# Altium PCB final_sensor_pcb.PcbDoc (part 1 of 3)
Units mm, origin at the board's own origin, x right, y up, seen from the top; angles counter-clockwise.
Board outline 100.5 x 21.64 mm, 2 copper layers (Top Layer, Bottom Layer); 86 components, 53 nets, 234 pads, 76 vias.
Unrouted connection lines stored in the file: 1.
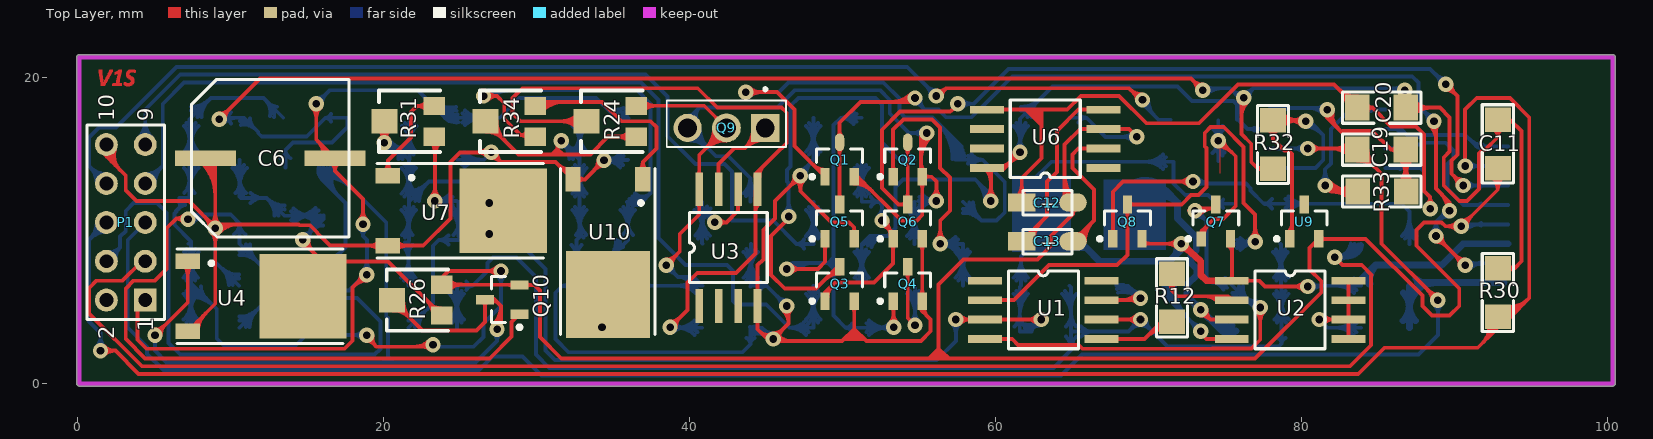
[diagram p0: Top Layer view]
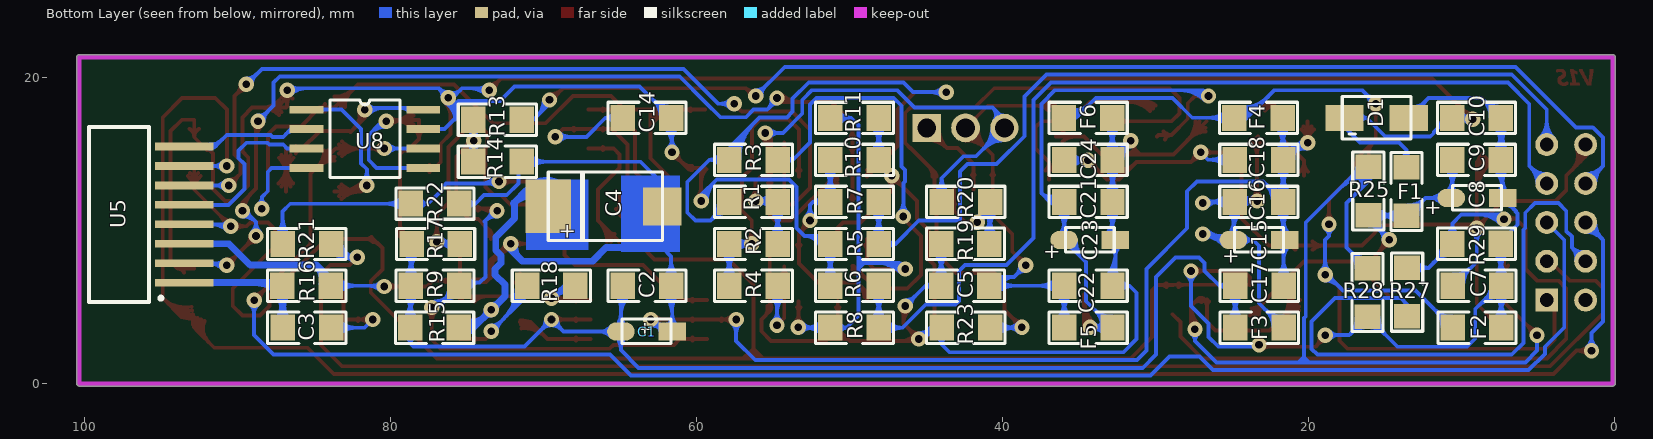
[diagram p1: Bottom Layer view, seen from below]

## Layer stack, top to bottom
Top Layer: signal copper 0.0356
Dielectric: dielectric 0.32, FR-4, Dk 4.8
Bottom Layer: signal copper 0.0356

## Board outline
0.127,-0.15 cw(c0.127,0) -0.023,0 -0.023,21.336 cw(c0.127,21.336) 0.127,21.486 100.33,21.486 cw(c100.33,21.336) 100.48,21.336 100.48,0 cw(c100.33,0) 100.33,-0.15

## Design rules (kind name [scope] priority, off if disabled: settings)
Clearance [All] p1: gap=0.254
DiffPairsRouting [All] p1: maxlimit=0.254 minlimit=0.254 mostfreqgap=0.254 maxuncoupledlength=12.7
PolygonConnect [All] p1: connectstyle=Relief reliefconductorwidth=0.254 reliefentries=4 polygonreliefangle="90 Angle"
RoutingVias [All] p1: holewidth=0.5 width=1 viastyle="Through Hole" minholewidth=0.5 minwidth=1 maxholewidth=0.5 maxwidth=1
SilkscreenOverComponentPads [All] p1: minsilkscreentomaskgap=0.254
SolderMaskExpansion [All] p1: expansion=0.102
Width [All] p1: maxlimit=0.5 minlimit=0.15 preferedwidth=0.15
26 further rules are at their usual default settings.

## Classes and differential pairs
differential pair OUT: +OUT_P -OUT_N

## Components (designator, comment, footprint, x,y, rotation, side; value= is the part's Value field where it differs from the comment)
C1 "4.7uf" cap_smd_a 63.259,3.433 r180 bottom
C2 "100nF" 1206 63.221,6.375 r270 bottom
C3 "0.22UF" 1206 85.471,3.683 r90 bottom
C4 "470uf" cap_smd_d 65.913,11.557 r0 bottom
C5 "100nf" 1206 42.418,6.375 r270 bottom
C6 "1000uf" c_cyl_smd 12.573,14.605 r180 top
C7 "100nf" 1206 9.017,6.426 r90 bottom
C8 "4.7uf" cap_smd_a 9.007,12.163 r180 bottom
C9 "100nf" 1206 9.045,14.656 r90 bottom
C10 "100nf" 1206 9.045,17.399 r90 bottom
C11 "100nf" 1206 92.837,15.685 r0 top
C12 "10uf" cap_smd_a 63.384,11.811 r180 top
C13 "10uf" cap_smd_a 63.384,9.271 r180 top
C14 "100nf" 1206 63.221,17.348 r270 bottom
C15 "4.7uf" cap_smd_a 23.241,9.419 r180 bottom
C16 "100nf" 1206 23.268,11.913 r90 bottom
C17 "100nf" 1206 23.241,6.426 r90 bottom
C18 "100nf" 1206 23.268,14.656 r90 bottom
C19 "Ceramic 330n" 1206 85.242,15.265 r270 top
C20 "100nf" 1206 85.242,18.009 r270 top
C21 "100nf" 1206 34.417,11.913 r90 bottom
C22 "100nf" 1206 34.417,6.426 r90 bottom
C23 "4.7uf" cap_smd_a 34.301,9.419 r180 bottom
C24 "100nf" 1206 34.417,14.656 r90 bottom
D1 "SMBJ5" tvs 15.621,17.399 r90 bottom
F1 "Ferrite bead" 1206 13.589,12.573 r180 bottom
F2 "Ferrite bead" 1206 8.992,3.632 r270 bottom
F3 "Ferrite bead" 1206 23.241,3.683 r90 bottom
F4 "Ferrite bead" 1206 23.268,17.348 r270 bottom
F5 "Ferrite bead" 1206 34.417,3.683 r90 bottom
F6 "Ferrite bead" 1206 34.392,17.348 r270 bottom
P1 "Header 5X2" HDR2X5 4.445,5.461 r90 top
Q1 "bc807" sot-23#1 49.784,14.605 r0 top
Q2 "bc807" sot-23#1 54.229,14.605 r0 top
Q3 "bc817" sot-23#2 49.784,6.477 r0 top
Q4 "bc817" sot-23#2 54.229,6.477 r0 top
Q5 "bc817" sot-23#2 49.784,10.541 r0 top
Q6 "bc817" sot-23#2 54.229,10.541 r0 top
Q7 "bc817" sot-23#3 74.358,10.541 r0 top
Q8 "bc817" sot-23#2 68.58,10.541 r0 top
Q9 "BD135" sot-32 42.418,17.018 r180 top
Q10 "bc817" sot-23#2 27.813,5.461 r90 top
R1 "10k" 1206 56.261,11.862 r270 bottom
R2 "10k" 1206 56.261,9.102 r270 bottom
R3 "1k" 1206 56.261,14.605 r270 bottom
R4 "1k" 1206 56.261,6.375 r270 bottom
R5 "0" 1206 49.657,9.102 r270 bottom
R6 "0" 1206 49.657,6.375 r270 bottom
R7 "470" 1206 49.657,11.862 r270 bottom
R8 "470" 1206 49.657,3.632 r270 bottom
R9 "18K" 1206 77.088,6.426 r90 bottom
R10 "10k" 1206 49.657,14.605 r270 bottom
R11 "10k" 1206 49.657,17.348 r270 bottom
R12 "100" 1206 71.501,5.6 r180 top
R13 "1K" 1206 73.024,17.272 r90 bottom
R14 "10K" 1206 73.024,14.529 r90 bottom
R15 "22" 1206 77.089,3.632 r270 bottom
R16 "1.5" 1206 85.446,6.375 r270 bottom
R17 "18K" 1206 77.05,9.153 r90 bottom
R18 "100" 1206 69.469,6.375 r270 bottom
R19 "10k" 1206 42.418,9.119 r270 bottom
R20 "10k" 1206 42.418,11.913 r90 bottom
R21 "1K" 1206 85.471,9.153 r90 bottom
R22 "10K" 1206 77.088,11.785 r90 bottom
R23 "10k" 1206 42.418,3.683 r90 bottom
R24 "RPot" "pot smd" 34.925,17.145 r90 top
R25 "Resistor" 1206 16.129,12.573 r0 bottom
R26 "RPot" "pot smd" 22.225,5.461 r90 top
R27 "1K" 1206 13.589,5.969 r0 bottom
R28 "Resistor" 1206 16.129,5.969 r180 bottom
R29 "1K" 1206 9.045,9.169 r90 bottom
R30 "Resistor" 1206 92.837,5.969 r0 top
R31 "RPot" "pot smd" 21.717,17.145 r90 top
R32 "Resistor" 1206 78.105,15.621 r180 top
R33 "Res 3K2" 1206 85.217,12.573 r90 top
R34 "RPot" "pot smd" 28.321,17.145 r90 top
U1 "TC4428" sop8 63.119,4.953 r0 top
U2 "IRF7105" sop8 79.248,4.953 r0 top
U3 "LM358N" sop8 42.418,8.89 r90 top
U4 "LM1117T-ADJ" dpak 10.541,5.461 r0 top
U5 "HMC1001" HMC1001 95.377,11.049 r90 bottom
U6 "LMC7660IM" sop8 63.246,15.875 r180 top
U7 "LM1117T-ADJ" dpak 23.622,11.049 r0 top
U8 "AMP04" sop8 81.661,16.129 r180 bottom
U9 "LM4040" sot-23#2 80.137,10.541 r0 top
U10 "LM1117T-ADJ" dpak 34.417,10.033 r270 top

## Footprints (in the part's own frame and the unit in brackets; to place one, negate y for a bottom-side part, rotate by r counter-clockwise, add the part's x,y. Pads: shape width x height; smd on the part's side, far side on the other; paste and mask are expansions set on the pad)
1206 [mm]
  rect 1.7x1.6 smd: 1(-0.025,-1.6) 2(-0.025,1.563)
  silkscreen extent -1.04,-2.57 0.99,2.54, body extent -0.81,-1.68 0.79,1.68, height 1.1
c_cyl_smd [mm]
  rect 4x1 smd: 1(4.191,-0.127) 2(-4.267,-0.127)
  silkscreen extent -5.18,-5.28 5.12,5.02, body extent -5.18,-5.28 5.12,5.02, height 10
cap_smd_a [mm]
  oval 1.8x1.2 smd: 1(-1.676,-0.025)
  rect 1.8x1.2 smd: 2(1.676,-0.025)
  silkscreen extent -1.6,-0.81 1.6,0.79
cap_smd_d [mm]
  rect 3x3.5 smd: 1(3.767,-0.025)
  rect 2.5x2.5 smd: 2(-3.683,-0.025)
  silkscreen extent -3.68,-2.29 3.77,2.21
dpak [mm]
  rect 1.6x1 smd: 1(-3.319,2.539) 3(-3.319,-2.031)
  rect 5.7x5.5 smd: 2(4.208,0.254)
  silkscreen extent -4.02,-2.83 6.83,3.34
HDR2X5 [mm] "Connector; Header; 5x2 Position"
  rect 1.5x1.5 hole 0.9: 1(0,0)
  round 1.5 hole 0.9: 2(0,2.54) 3(2.54,0) 4(2.54,2.54) 5(5.08,0) 6(5.08,2.54) 7(7.62,0) 8(7.62,2.54) 9(10.16,0) 10(10.16,2.54)
  silkscreen extent -1.27,-1.27 11.43,3.81
HMC1001 [mm]
  rect 0.5x3.81 smd: 1(-4.445,-1.905) 2(-3.175,-1.905) 3(-1.905,-1.905) 4(-0.635,-1.905) 5(0.635,-1.905) 6(1.905,-1.905) 7(3.175,-1.905) 8(4.445,-1.905)
  silkscreen extent -5.71,-0.48 5.71,4.32
"pot smd" [mm]
  rect 1.2x1.4 smd: 1(-1,-1.6) 3(1,-1.6)
  rect 1.6x1.7 smd: 2(0,1.65)
  silkscreen extent -2,-2 2,2
sop8 [mm]
  rect 2.2x0.5 smd: 1(-3.81,1.778) 2(-3.81,0.508) 3(-3.81,-0.762) 4(-3.81,-2.032) 5(3.806,-2.032) 6(3.806,-0.762) 7(3.806,0.508) 8(3.806,1.778)
  silkscreen extent -2.29,-2.67 2.29,2.41
sot-23#1 [mm]
  rect 0.6x1.15 smd: 1(-0.919,-1.081) 2(0.981,-1.081)
  oval 0.6x1.15 smd: 3(0.031,1.169)
  silkscreen extent -1.89,-1.21 1.53,0.74, body extent -1.42,-1.18 1.48,1.12, height 1
sot-23#2 [mm]
  rect 0.6x1.15 smd: 1(-0.919,-1.081) 2(0.981,-1.081) 3(0.031,1.169)
  silkscreen extent -1.89,-1.21 1.53,0.74, body extent -1.42,-1.18 1.48,1.12, height 1
sot-23#3 [mm]
  rect 0.6x1 smd: 1(-0.919,-1.081)
  rect 0.6x1.15 smd: 2(0.981,-1.081) 3(0.031,1.169)
  silkscreen extent -1.89,-1.21 1.53,0.74, body extent -1.42,-1.18 1.48,1.12, height 1
sot-32 [mm]
  rect 1.85x1.85 hole 1.23: 1(-2.54,0.305)
  round 1.88 hole 1.25: 2(0,0.305)
  round 1.85 hole 1.23: 3(2.54,0.305)
  silkscreen extent -3.9,-2.32 3.9,1.56
tvs [mm]
  rect 1.7x2.5 smd: 1(-0.025,-2.159) 2(-0.025,2.032)
  silkscreen extent -1.42,-2.32 1.38,2.18, body extent -1.5,-2.76 1.42,2.74, height 2.23

## Part data
C1 C4 C8 C12 C13 C15 C23: library part "Cap Pol1", "Polarized Capacitor (Radial)"
C2 C3 C5 C7 C9 C10 C11 C14 C16 C17 C18 C19 C20 C21 C22 C24: library part Cap, "Capacitor"
C6: library part "Cap Pol1", "electrolytic smd cap"
D1: library part "Diode 10TQ040", "tvs"
F1 F2 F3 F4 F5 F6: library part Inductor, "Ferrite bead, 1206"
P1: "Header, 5-Pin, Dual row"
Q1 Q2: library part 2N3906, "PNP General Purpose Amplifier"
Q3 Q4 Q5 Q6 Q7 Q8 Q9 Q10: library part 2N3904, "NPN General Purpose Amplifier"
R1 R2 R3 R4 R5 R6 R7 R8 R9 R10 R11 R12 R13 R14 R15 R16 R17 R18 R19 R20 R21 R22 R23 R27 R29: library part Res1, "Resistor"
R24 R26 R31 R34: "Potentiometer"
R25 R28 R30 R32: "Resistor, 1/4W"
R33: library part Resistor, "General Resistor"
U2: library part IRF7106
U3: "Dual Low-Power Operational Amplifier"
U4 U7 U10: "800mA Low-Dropout Linear Regulator"
U6: "Switched Capacitor Voltage Converter"
U8: library part "Op Amp"
U9: "Precision Micropower Shunt Voltage Reference, 3-pin SOT-23"

## Via types
v1: diameter 1, hole 0.5, Top Layer to Bottom Layer, 76 vias

## Nets (pads, with @x,y where several pads share a name; then routed paths per layer and width w, separated by ;. In a path a pad name is that pad's centre, name@x,y a point inside that pad or via, vN(x,y) a via of type N, cw(c..) or ccw(c..) an arc to the next point about the centre after c; other vN are vias at no path point)
5V0: C10.2 C11.2 C14.2 C20.2 D1.2 F1.2 R5.1 R6.1 R30.2 R32.2 U6.8 U8.7 | length 236
  Top Layer w0.254: v1(9.271,17.272) 11.938,19.939 72.771,19.939 v1(73.533,19.177) ; v1@9.271,17.645 ccw(c9.271,18.545) 9.908,17.909 ccw(c10.544,17.272) v1@9.644,17.272 ; U6.8@59.353,14.01 cw(c58.54,13.197) 59.69,13.197 ; v1@59.426,12.202 ccw(c58.79,12.838) 59.69,12.838 ccw(c60.59,12.838) v1@59.954,12.202 ; U6.8@59.533,14.19 cw(c59.153,13.81) 59.69,13.81 ; v1(59.69,11.938) 59.69,13.847 U6.8@59.44,14.097 60.579,14.097 ; U6.8@60.29,13.966 ccw(c60.29,14.347) 60.56,14.078 ; U6.8@60.29,14.22 ccw(c60.29,15.215) 60.993,14.511 ; U6.8@60.379,14.012 cw(c60.579,13.819) 60.579,14.097 ; U6.8@60.379,14.182 ccw(c60.579,14.375) 60.579,14.097 ; v1@61.222,15.113 cw(c60.322,15.113) 60.958,14.476 cw(c61.595,13.84) v1@61.595,14.74 ; v1(61.595,15.113) 60.579,14.097 ; v1@73.16,19.177 ccw(c72.26,19.177) 72.896,19.814 ccw(c73.533,20.45) v1@73.533,19.55 ; v1@75.945,18.413 cw(c75.636,18.104) 76.073,18.104 ; 76.073,17.449 cw(c77.437,17.449) v1@76.472,18.413 ; 76.073,18.062 cw(c76.824,18.062) v1@76.293,18.593 ; v1@76.073,18.542 76.073,16.315 76.708,15.68 76.708,14.478 77.128,14.058 ; R32.2@77.446,13.833 ccw(c77.128,13.721) 77.128,14.058 ; R32.2@77.446,14.283 cw(c77.128,14.396) 77.128,14.058 ; R32.2@78.13,14.058 77.128,14.058 ; C20.2@86.401,18.622 ccw(c85.888,19.304) v1@86.741,19.304 ; v1@86.477,18.913 cw(c85.841,18.277) 86.741,18.277 cw(c87.641,18.277) v1@87.005,18.913 ; C20.2@86.741,18.098 v1@86.741,19.304 ; C20.2@86.741,18.884 ccw(c87.225,18.884) C20.2@87,18.455 ; C20.2@86.805,18.034 89.027,18.034 89.662,17.399 89.662,15.172 89.281,14.791 89.281,12.954 90.297,11.938 90.805,11.938 91.581,12.714 91.581,15.043 91.804,15.266 91.974,15.266 92.812,16.104 ; C20.2@87.101,17.738 cw(c87.817,17.023) 87.817,18.034 cw(c87.817,19.046) C20.2@87.101,18.33 ; C20.2@87.118,18.68 cw(c87.446,19.304) v1@86.741,19.304 ; C20.2@87.281,17.558 cw(c88.43,16.409) 88.43,18.034 cw(c88.43,19.659) C20.2@87.281,18.51 ; C11.2@92.484,16.66 cw(c92.175,16.104) 92.812,16.104 ; R30.2@92.812,7.532 93.892,7.532 ; C11.2@93.139,16.66 ccw(c93.448,16.104) 92.812,16.104 ; R30.2@93.478,7.261 cw(c93.892,7.08) 93.892,7.532 ; R30.2@93.478,7.802 ccw(c93.892,7.984) 93.892,7.532 ; 92.812,16.104 C11.2@92.812,17.248 93.623,17.248 94.361,16.51 94.361,8.001 93.892,7.532
  Bottom Layer w0.254: v1(9.271,17.272) v1@9.373,17.374 ; v1@9.355,17.188 cw(c9.804,16.739) 9.804,17.374 ; v1@9.535,17.008 cw(c10.417,16.126) C10.2@10.417,17.374 ; v1@9.535,17.536 ccw(c9.926,17.927) C10.2@9.926,17.374 ; C10.2@10.042,17.009 ccw(c9.373,16.578) v1@9.373,17.374 ; C10.2@10.042,17.738 cw(c9.373,18.17) v1@9.373,17.374 ; C10.2@10.638,17.162 cw(c10.781,16.409) C10.2@11.323,16.95 ; C10.2@10.685,16.912 cw(c10.889,15.838) 11.662,16.611 ; C10.2@11.28,17.324 ccw(c12.079,17.324) 11.514,16.759 ; F1.2@13.294,14.728 ccw(c13.003,15.265) 13.614,15.265 ; F1.2@13.614,14.136 13.614,15.265 ; F1.2@13.935,14.728 cw(c14.226,15.265) 13.614,15.265 ; D1.2@16.571,17.133 ccw(c16.231,17.012) 16.231,17.374 ; D1.2@16.571,17.615 cw(c16.231,17.735) 16.231,17.374 ; R6.1@50.781,6.927 ccw(c49.632,8.076) 51.257,8.076 ccw(c52.882,8.076) R6.1@51.733,6.927 ; R5.1@50.781,8.602 cw(c49.632,7.453) 51.257,7.453 cw(c52.882,7.453) R5.1@51.733,8.602 ; R6.1@50.961,6.747 ccw(c50.246,7.462) 51.257,7.462 ccw(c52.269,7.462) R6.1@51.553,6.747 ; R5.1@50.961,8.781 cw(c50.246,8.066) 51.257,8.066 cw(c52.269,8.066) R5.1@51.553,8.781 ; R6.1@51.257,6.401 R5.1@51.257,9.128 51.79,9.66 52.943,9.66 ; R5.1@51.411,9.118 cw(c52.202,8.812) 52.202,9.66 ; R5.1@51.648,9.026 cw(c52.572,8.669) 52.572,9.66 ; R5.1@51.885,8.935 cw(c52.943,8.526) 52.943,9.66 ; 58.784,13.225 cw(c57.497,11.938) v1@59.317,11.938 ; 59.217,12.792 cw(c58.364,11.938) v1@59.571,11.938 ; v1(59.69,11.938) 59.69,12.319 58.674,13.335 53.957,13.335 53.467,12.845 53.467,10.184 52.943,9.66 ; C14.2@61.182,16.848 cw(c60.185,15.851) 61.595,15.851 ; v1@61.331,15.377 ccw(c60.695,16.013) 61.595,16.013 ccw(c62.495,16.013) v1@61.859,15.377 ; C14.2@61.362,17.027 cw(c60.798,16.464) 61.595,16.464 ; v1@61.595,15.547 cw(c63.434,15.547) C14.2@62.134,16.848 ; 61.595,16.16 cw(c62.821,16.16) C14.2@61.954,17.027 ; C14.2@61.658,17.843 ccw(c61.658,18.975) 62.458,18.174 ; C14.2@61.658,18.097 ccw(c61.658,19.842) 62.892,18.608 ; v1@61.722,15.113 v1(61.595,15.113) 61.595,17.311 C14.2@61.658,17.374 63.715,19.431 71.882,19.431 72.835,18.478 75.544,18.478 75.767,18.254 ; C14.2@62.077,17.424 cw(c62.968,17.424) C14.2@62.338,18.053 ; C14.2@62.331,17.424 cw(c63.835,17.424) 62.771,18.487 ; v1(73.533,19.177) 73.66,19.304 75.311,19.304 75.938,18.677 v1@76.19,18.677 ; v1@73.617,19.093 cw(c74.127,18.583) 74.127,19.304 cw(c74.127,19.771) v1@73.797,19.441 ; v1@73.797,18.913 cw(c74.74,17.97) 74.74,19.304 ; 75.446,19.169 ccw(c75.875,19.597) v1@76.081,19.028 ; 75.729,18.886 ccw(c76.025,19.183) v1@76.168,18.789 ; 75.767,17.254 cw(c77.046,17.254) v1@76.398,18.355 ; 75.767,17.698 cw(c76.785,17.698) v1@76.269,18.574 ; 75.767,18.142 cw(c76.524,18.142) v1@76.14,18.793 ; v1@76.213,19.05 ccw(c76.222,19.917) 76.836,19.304 ; v1@76.582,18.681 cw(c77.449,18.691) 76.836,19.304 ; U8.7@76.918,16.55 ccw(c76.708,16.34) 76.708,16.637 ccw(c76.708,16.934) U8.7@76.918,16.724 ; U8.7@77.855,16.637 76.454,16.637 75.767,17.324 75.767,18.254 ; 85.534,19.304 cw(c85.534,17.97) v1@86.477,18.913 ; v1@86.477,19.441 cw(c86.147,19.771) 86.147,19.304 cw(c86.147,18.583) v1@86.657,19.093 ; v1@86.741,19.304 76.836,19.304 ; v1@9.373,17.374 C10.2@10.607,17.374 10.9,17.374 11.831,16.442 11.831,16.366 12.054,16.143 15,16.143 16.231,17.374 ; 13.614,15.265 14.097,15.748 16.637,15.748 17.653,16.764 D1.2@17.653,17.374 16.231,17.374 ; 75.767,18.254 v1@76.19,18.677 ; v1@76.19,18.677 v1(76.209,18.677) 76.836,19.304
  other v1: 86.741,19.177
8V0: C1.1 C2.1 C17.2 F3.2 R9.2 R15.1 R17.2 U1.6 | length 119.2
  Top Layer w0.254: U1.6@66.925,4.191 v1(69.469,4.191) ; U1.6@67.862,4.104 cw(c68.072,3.894) 68.072,4.191 cw(c68.072,4.488) U1.6@67.862,4.278 ; v1@69.205,3.927 ccw(c68.568,3.29) 68.568,4.191 ccw(c68.569,5.091) v1@69.205,4.455
  Bottom Layer w0.254: F3.2@24.328,4.184 ccw(c23.179,5.332) 24.804,5.332 ccw(c26.429,5.332) F3.2@25.28,4.184 ; C17.2@24.328,5.875 cw(c23.179,4.726) 24.804,4.726 cw(c26.429,4.726) C17.2@25.28,5.875 ; F3.2@24.508,4.004 ccw(c23.792,4.719) 24.804,4.719 ccw(c25.815,4.719) F3.2@25.1,4.004 ; C17.2@24.508,6.055 cw(c23.792,5.339) 24.804,5.339 cw(c25.815,5.339) C17.2@25.1,6.055 ; F3.2@24.804,3.658 C17.2@24.804,6.401 25.832,6.401 ; C17.2@25.421,6.132 cw(c25.832,5.952) 25.832,6.401 ; C17.2@25.421,6.67 ccw(c25.832,6.85) 25.832,6.401 ; C2.1@64.345,5.875 cw(c62.92,4.45) 64.935,4.45 ; C2.1@64.525,6.054 cw(c63.534,5.063) 64.935,5.063 ; C1.1@64.601,3.073 cw(c63.793,2.266) 64.935,2.266 cw(c66.077,2.266) C1.1@65.269,3.073 ; C1.1@64.601,3.742 ccw(c63.793,4.55) 64.935,4.55 ccw(c66.077,4.55) C1.1@65.269,3.742 ; C2.1@64.821,6.401 64.935,6.286 C1.1@64.935,3.408 ; 64.935,5.002 cw(c66.17,5.002) C2.1@65.297,5.875 ; C1.1@65.569,3.073 cw(c66.377,2.266) 66.377,3.408 cw(c66.377,4.55) C1.1@65.569,3.742 ; v1@69.096,4.191 cw(c68.196,4.191) 68.832,3.554 cw(c69.469,2.918) 69.469,3.818 cw(c69.469,2.918) 70.106,3.554 cw(c70.742,4.191) v1@69.842,4.191 ; R17.2@78.137,8.602 cw(c76.898,7.363) 78.65,7.363 ; R9.2@78.175,5.875 cw(c76.932,4.632) 78.689,4.632 ; R9.2@78.175,6.926 ccw(c77.026,8.075) 78.65,8.075 ccw(c80.275,8.075) R9.2@79.126,6.926 ; R15.1@78.213,4.183 ccw(c77.064,5.332) 78.689,5.332 ccw(c80.314,5.332) R15.1@79.165,4.183 ; R17.2@78.317,8.781 cw(c77.511,7.976) 78.65,7.976 ; R9.2@78.354,6.054 cw(c77.545,5.245) 78.689,5.245 ; R9.2@78.354,6.747 ccw(c77.639,7.462) 78.65,7.462 ccw(c79.662,7.462) R9.2@78.947,6.747 ; R15.1@78.393,4.004 ccw(c77.678,4.719) 78.689,4.719 ccw(c79.701,4.719) R15.1@78.985,4.004 ; R15.1@78.441,2.982 cw(c78.296,2.616) 78.689,2.616 ; R17.2@78.613,9.128 78.65,9.09 R9.2@78.65,6.401 78.689,6.362 R15.1@78.689,3.658 78.689,2.616 ; 78.65,7.543 cw(c80.147,7.543) R17.2@79.089,8.602 ; 78.65,8.156 cw(c79.534,8.156) R17.2@78.909,8.781 ; 78.689,4.819 cw(c80.182,4.819) R9.2@79.126,5.875 ; 78.689,5.433 cw(c79.568,5.433) R9.2@78.947,6.054 ; R15.1@78.938,2.982 ccw(c79.083,2.616) 78.689,2.616 ; 25.832,6.401 26.805,7.374 26.805,7.882 27.178,8.255 28.702,8.255 29.972,6.985 29.972,1.905 30.838,1.039 63.777,1.039 64.935,2.197 C1.1@64.935,3.408 ; C1.1@64.935,3.408 68.686,3.408 v1(69.469,4.191) 71.233,2.427 78.5,2.427 78.689,2.616
12V0: C5.2 C22.2 F5.2 Q9.2 R24.3 U3.8 | length 58.5
  Top Layer w0.254: R24.3@36.525,18.145 36.541,18.161 40.97,18.161 Q9.2@42.418,16.713 40.64,14.935 U3.8@40.64,12.696 40.64,11.049 39.37,9.779 39.37,8.636 v1(38.481,7.747) ; R24.3@36.959,17.811 cw(c37.806,16.965) 37.806,18.161 ; R24.3@36.959,18.479 ccw(c37.728,19.248) 37.728,18.161 ; v1@38.481,8.12 ccw(c38.481,9.02) 39.118,8.384 ccw(c39.754,7.747) v1@38.854,7.747 ; U3.8@40.553,11.759 cw(c40.343,11.549) 40.64,11.549 cw(c40.937,11.549) U3.8@40.727,11.759 ; U3.8@40.553,13.633 ccw(c40.343,13.843) 40.64,13.843 ccw(c40.937,13.843) U3.8@40.727,13.633 ; Q9.2@41.605,16.713 cw(c39.642,16.713) 41.03,15.325 cw(c42.418,13.937) Q9.2@42.418,15.9 ; Q9.2@41.859,16.713 cw(c40.509,16.713) 41.464,15.759 cw(c42.418,14.804) Q9.2@42.418,16.154
  Bottom Layer w0.254: F5.2@35.504,4.184 ccw(c34.355,5.332) 35.98,5.332 ccw(c37.605,5.332) F5.2@36.456,4.184 ; C22.2@35.504,5.875 cw(c34.355,4.726) 35.98,4.726 cw(c37.605,4.726) C22.2@36.456,5.875 ; F5.2@35.684,4.004 ccw(c34.968,4.719) 35.98,4.719 ccw(c36.991,4.719) F5.2@36.276,4.004 ; C22.2@35.684,6.055 cw(c34.968,5.339) 35.98,5.339 cw(c36.991,5.339) C22.2@36.276,6.055 ; F5.2@35.98,3.658 C22.2@35.98,6.401 C5.2@40.855,6.401 40.271,6.985 39.243,6.985 ; C22.2@36.276,6.105 cw(c36.991,5.389) 36.991,6.401 cw(c36.991,7.412) C22.2@36.276,6.697 ; C22.2@36.456,5.925 cw(c37.605,4.776) 37.605,6.401 cw(c37.605,8.026) C22.2@36.456,6.877 ; v1@38.481,7.374 cw(c38.481,6.474) 39.118,7.11 cw(c39.754,7.747) v1@38.854,7.747 ; v1(38.481,7.747) 39.243,6.985 ; 39.582,6.985 cw(c39.582,6.077) C5.2@40.453,6.333 ; 39.921,6.985 cw(c39.921,6.177) C5.2@40.697,6.404 ; C5.2@40.209,6.261 ccw(c39.243,5.978) 39.243,6.985 ; C5.2@40.379,5.925 ccw(c39.23,4.776) 39.23,6.401 ccw(c39.23,8.026) C5.2@40.379,6.877 ; C5.2@40.559,6.105 ccw(c39.844,5.389) 39.844,6.401 ccw(c39.844,7.412) C5.2@40.559,6.697
-5V0: C12.2 C20.1 U6.5 U8.4 | length 59.3
  Top Layer w0.254: U6.5@59.44,17.907 61.976,17.907 ; U6.5@60.377,17.82 cw(c60.587,17.61) 60.587,17.907 cw(c60.587,18.204) U6.5@60.377,17.994 ; C12.2@61.373,12.171 ccw(c60.566,12.978) 61.708,12.978 ccw(c62.85,12.978) C12.2@62.042,12.171 ; C12.2@61.708,11.836 61.708,13.448 62.992,14.732 62.992,16.891 61.976,17.907 ; 75.336,19.05 75.387,19.101 ; 82.408,19.268 ccw(c83.642,20.503) C20.1@83.642,18.757 ; 82.529,19.148 cw(c81.465,18.084) C20.1@82.969,18.084 ; 82.842,18.835 ccw(c83.642,19.635) C20.1@83.642,18.503 ; C20.1@82.962,18.714 cw(c82.332,18.084) C20.1@83.223,18.084 ; C20.1@84.272,17.796 cw(c84.616,17.666) 84.616,18.034 ; C20.1@84.272,18.272 ccw(c84.616,18.403) 84.616,18.034 ; 87.986,13.58 87.986,16.299 87.482,16.803 85.847,16.803 84.616,18.034 ; 87.998,13.567 87.998,12.586 88.392,12.192 ; v1@88.163,11.725 ccw(c87.8,12.192) 88.392,12.192 ; v1(88.392,11.43) 88.392,12.192 ; v1@88.621,11.725 cw(c88.984,12.192) 88.392,12.192 ; 61.976,17.907 64.687,17.907 65.576,18.796 68.072,18.796 69.85,17.018 73.304,17.018 75.387,19.101 ; 75.387,19.101 75.844,19.558 76.574,19.558 82.118,19.558 C20.1@83.642,18.034 84.616,18.034
  Bottom Layer w0.254: U8.4@85.471,14.097 87.757,14.097 88.011,13.843 88.011,12.573 88.392,12.192 ; U8.4@86.408,14.01 cw(c86.618,13.8) 86.618,14.097 cw(c86.618,14.394) U8.4@86.408,14.184 ; v1@88.163,11.725 ccw(c87.8,12.192) 88.392,12.192 ; v1(88.392,11.43) 88.392,12.192 ; v1@88.621,11.725 cw(c88.984,12.192) 88.392,12.192
ADS_IN: C19.1 P1.5 U8.6 | length 130.6
  Top Layer w0.254: v1(80.391,15.367) 83.566,15.367 C19.1@83.642,15.291 85.217,13.716 85.217,9.144 v1(88.9,5.461) ; v1@80.655,15.103 cw(c81.291,14.467) 81.291,15.367 cw(c81.291,16.267) v1@80.655,15.631 ; 81.954,15.367 cw(c81.954,13.653) C19.1@83.166,14.865 ; 82.081,15.367 ccw(c82.081,16.902) C19.1@83.166,15.817 ; 82.567,15.367 cw(c82.567,14.266) C19.1@83.346,15.045 ; 82.694,15.367 ccw(c82.694,16.289) C19.1@83.346,15.637 ; C19.1@83.642,14.568 cw(c83.642,12.822) 84.876,14.057 ; C19.1@83.642,14.822 cw(c83.642,13.69) 84.443,14.49 ; C19.1@84.061,15.241 ccw(c84.952,15.241) C19.1@84.322,14.611 ; C19.1@84.315,15.241 ccw(c85.819,15.241) 84.756,14.177 ; v1@88.527,5.461 ccw(c87.627,5.461) 88.263,6.098 ccw(c88.9,6.734) v1@88.9,5.834
  Bottom Layer w0.254: P1.5@4.445,10.541 3.302,9.398 3.302,3.683 4.572,2.413 4.572,1.949 5.632,0.889 26.245,0.889 27.134,1.778 29.083,1.778 30.33,0.531 64.271,0.531 65.659,1.919 87.644,1.919 88.9,3.175 v1(88.9,5.461) ; U8.6@77.855,15.367 v1@80.137,15.367 ; U8.6@78.792,15.28 cw(c79.002,15.07) 79.002,15.367 cw(c79.002,15.664) U8.6@78.792,15.454 ; v1@80.127,15.103 ccw(c79.491,14.467) 79.491,15.367 ccw(c79.491,16.267) v1@80.127,15.631 ; v1@88.636,5.197 cw(c88,4.561) 88.9,4.561 cw(c89.8,4.561) v1@89.164,5.197
BGND: C5.1 C21.1 C22.1 C23.2 C24.1 F6.2 Q3.2 Q4.2 Q5.2 Q6.2 R10.2 R11.2 R19.1 R23.2 R24.1 R34.2 U3.4 | length 181.8
  Top Layer w0.254: R34.2@26.671,17.145 28.83,14.986 31.369,14.986 ; R34.2@26.721,16.472 cw(c26.721,14.968) 27.785,16.031 ; R34.2@26.721,16.726 cw(c26.721,15.835) R34.2@27.351,16.465 ; R34.2@27.14,17.145 ccw(c28.272,17.145) 27.472,16.344 ; R34.2@27.394,17.145 ccw(c29.139,17.145) 27.905,15.911 ; v1(31.623,15.875) 31.496,15.875 31.369,15.748 31.369,14.986 ; R24.1@36.091,15.811 ccw(c35.283,15.003) 35.283,16.145 ccw(c35.283,17.287) R24.1@36.091,16.479 ; R24.1@36.525,16.145 34.687,16.145 33.528,14.986 31.369,14.986 ; U3.4@44.363,4.143 cw(c44.153,3.933) 44.45,3.933 cw(c44.747,3.933) U3.4@44.537,4.143 ; U3.4@44.363,6.017 ccw(c44.153,6.227) 44.45,6.227 ccw(c44.747,6.227) U3.4@44.537,6.017 ; 44.641,3.365 ccw(c45.048,3.773) v1@45.302,3.256 ; 44.892,3.114 ccw(c45.213,3.436) v1@45.414,3.028 ; v1@45.148,2.857 44.45,3.556 U3.4@44.45,5.08 44.45,7.747 44.831,8.128 44.831,10.033 45.593,10.795 45.593,11.938 v1(47.244,13.589) 47.244,12.573 49.276,10.541 50.419,10.541 50.765,10.195 Q5.2@50.765,9.46 ; v1@45.212,2.921 v1(45.466,2.921) 46.482,3.937 v1@46.482,5.08 ; v1@45.466,2.794 49.968,2.794 50.765,3.591 ; v1@45.466,3.294 ccw(c45.466,4.194) 46.103,3.558 ccw(c46.739,2.921) v1@45.839,2.921 ; v1@45.55,3.005 ccw(c46.06,3.515) 46.06,2.794 ccw(c46.06,2.327) v1@45.73,2.657 ; v1@45.73,3.185 ccw(c46.673,4.128) 46.673,2.794 ; v1@46.101,4.807 cw(c45.283,3.93) 46.482,3.93 ; v1@46.274,4.993 cw(c45.827,4.514) 46.482,4.514 ; 46.482,4.486 cw(c46.949,4.486) v1@46.619,4.816 ; v1@46.871,13.589 cw(c45.971,13.589) 46.607,12.952 cw(c47.244,12.316) v1@47.244,13.216 ; v1@46.98,13.325 cw(c46.344,12.689) 47.244,12.689 cw(c48.144,12.689) v1@47.508,13.325 ; Q3.2@50.643,4.999 cw(c50.347,4.703) 50.765,4.703 cw(c51.183,4.703) Q3.2@50.887,4.999 ; Q5.2@50.643,9.857 ccw(c50.347,10.153) 50.765,10.153 ccw(c51.183,10.153) Q5.2@50.887,9.857 ; Q3.2@50.765,5.396 50.765,3.591 ; Q4.2@55.088,5.793 ccw(c54.792,6.089) 55.21,6.089 ccw(c55.628,6.089) Q4.2@55.332,5.793 ; Q6.2@55.088,9.063 cw(c54.792,8.767) 55.21,8.767 cw(c55.628,8.767) Q6.2@55.332,9.063 ; Q4.2@55.132,5.142 ccw(c55.577,5.02) 55.251,4.693 ; Q6.2@55.21,9.46 Q4.2@55.21,5.396 55.21,4.734 ; Q4.2@55.377,5.075 ccw(c56.062,4.887) 55.559,4.385 ; 50.765,3.591 51.562,2.794 55.118,2.794 55.753,3.429 55.753,4.191 55.21,4.734 ; 55.21,4.734 cw(c55.556,4.734) 55.325,4.992 ccw(c55.556,4.734) 55.21,4.734 ; 55.21,4.734 ccw(c54.864,4.734) 55.095,4.992 cw(c54.864,4.734) 55.21,4.734
  Bottom Layer w0.254: v1@31.623,15.502 cw(c31.623,14.724) C24.1@32.173,15.274 ; v1(31.623,15.875) 31.496,15.875 31.369,15.748 31.699,15.748 C24.1@32.817,14.63 ; v1@31.996,15.875 ccw(c33.019,15.875) C24.1@32.296,15.152 ; C24.1@32.107,15.34 ccw(c32.701,15.934) C24.1@32.778,15.098 ; C24.1@32.144,14.69 ccw(c30.711,14.71) 31.724,15.723 ccw(c32.636,16.635) C24.1@32.755,15.351 ; C24.1@32.15,15.298 cw(c31.55,14.698) C24.1@32.398,14.686 ; C22.1@32.222,6.086 ccw(c31.699,5.809) 31.699,6.401 ; C22.1@32.222,6.716 cw(c31.699,6.992) 31.699,6.401 ; C23.2@32.29,9.06 cw(c31.483,8.252) 32.625,8.252 cw(c33.767,8.252) C23.2@32.959,9.06 ; C22.1@32.341,6.927 ccw(c31.656,7.612) 32.625,7.612 ; C21.1@32.341,11.361 cw(c31.192,10.213) 32.817,10.213 cw(c34.442,10.213) C21.1@33.293,11.361 ; C21.1@32.341,12.413 ccw(c31.192,13.562) 32.817,13.562 ccw(c34.442,13.562) C21.1@33.293,12.413 ; C24.1@32.341,14.105 cw(c31.192,12.956) 32.817,12.956 cw(c34.442,12.956) C24.1@33.293,14.105 ; C24.1@32.341,15.156 ccw(c31.163,16.334) 32.829,16.334 ; F6.2@32.353,16.848 cw(c31.204,15.699) 32.829,15.699 cw(c34.454,15.699) F6.2@33.305,16.848 ; C21.1@32.521,11.541 cw(c31.805,10.826) 32.817,10.826 cw(c33.828,10.826) C21.1@33.113,11.541 ; C21.1@32.521,12.234 ccw(c31.805,12.949) 32.817,12.949 ccw(c33.828,12.949) C21.1@33.113,12.234 ; C24.1@32.521,14.284 cw(c31.805,13.569) 32.817,13.569 cw(c33.828,13.569) C24.1@33.113,14.284 ; C24.1@32.521,14.977 ccw(c31.776,15.721) 32.829,15.721 ; F6.2@32.533,17.027 cw(c31.817,16.312) 32.829,16.312 cw(c33.84,16.312) F6.2@33.125,17.027 ; C23.2@32.59,9.728 ccw(c32.043,10.276) 32.817,10.276 ; 32.625,7.313 ccw(c33.679,7.313) C22.1@32.933,6.568 ; 32.625,7.926 ccw(c34.292,7.926) C22.1@33.113,6.747 ; 32.625,8.54 ccw(c34.906,8.54) C22.1@33.293,6.927 ; 32.817,10.183 ccw(c33.714,10.183) C23.2@33.079,9.549 ; 32.817,10.796 ccw(c34.327,10.796) C23.2@33.259,9.728 ; 32.829,15.663 ccw(c33.799,15.663) C24.1@33.113,14.977 ; 32.829,16.276 ccw(c34.413,16.276) C24.1@33.293,15.156 ; F6.2@32.829,17.374 32.829,14.642 C24.1@32.817,14.63 ; C5.1@43.542,6.927 ccw(c42.393,8.076) 44.018,8.076 ccw(c45.643,8.076) C5.1@44.494,6.927 ; R19.1@43.542,8.618 cw(c42.393,7.469) 44.018,7.469 cw(c45.643,7.469) R19.1@44.494,8.618 ; R23.2@43.711,2.991 cw(c43.531,2.579) 43.981,2.579 ; C5.1@43.722,6.747 ccw(c43.007,7.462) 44.018,7.462 ccw(c45.03,7.462) C5.1@44.314,6.747 ; R19.1@43.722,8.798 cw(c43.007,8.082) 44.018,8.082 cw(c45.03,8.082) R19.1@44.314,8.798 ; R23.2@43.956,3.693 cw(c44.235,2.721) 44.951,3.436 ; C5.1@43.981,6.363 C5.1@44.018,6.401 ; R19.1@44.018,9.144 C5.1@44.018,6.401 ; R23.2@44.026,3.449 cw(c44.371,2.247) v1@45.256,3.131 ; R23.2@44.096,3.205 cw(c44.507,1.773) v1@45.56,2.827 ; R23.2@44.25,2.991 ccw(c44.431,2.579) 43.981,2.579 ; C5.1@44.638,6.138 cw(c45.034,5.971) 45.034,6.401 ; C5.1@44.638,6.663 ccw(c45.034,6.831) 45.034,6.401 ; v1@45.093,2.921 ccw(c44.193,2.921) 44.829,3.558 ccw(c45.466,4.194) v1@45.466,3.294 ; v1(45.466,2.921) 44.729,3.658 R23.2@43.981,3.658 43.981,2.579 ; v1@45.982,5.08 ccw(c45.082,5.08) 45.718,5.717 ccw(c46.355,6.353) v1@46.355,5.453 ; v1(46.355,5.08) 45.034,6.401 ; v1(47.244,13.589) 47.244,13.78 R10.2@48.094,14.63 R11.2@48.094,17.374 ; v1@47.244,13.962 ccw(c47.244,14.401) R10.2@47.554,14.091 ; v1@47.363,13.589 cw(c48.112,13.589) R10.2@47.582,14.119 ; v1@47.617,13.589 cw(c48.979,13.589) R10.2@48.016,14.552 ; R10.2@47.618,15.156 ccw(c46.469,16.305) 48.094,16.305 ccw(c49.719,16.305) R10.2@48.57,15.156 ; R11.2@47.618,16.848 cw(c46.469,15.699) 48.094,15.699 cw(c49.719,15.699) R11.2@48.57,16.848 ; R10.2@47.798,14.977 ccw(c47.083,15.692) 48.094,15.692 ccw(c49.106,15.692) R10.2@48.39,14.977 ; R11.2@47.798,17.027 cw(c47.083,16.312) 48.094,16.312 cw(c49.106,16.312) R11.2@48.39,17.027 ; 31.699,6.401 C22.1@32.817,6.401 32.625,6.593 C23.2@32.625,9.394 32.817,9.586 C21.1@32.817,11.887 C24.1@32.817,14.63 ; 31.699,6.401 31.242,5.944 31.242,2.921 32.108,2.055 43.457,2.055 43.981,2.579 ; C5.1@44.018,6.401 45.034,6.401
GND_IN: C6.2 F2.1 F4.1 F6.1 P1.1 P1.2 | length 101.7
  Top Layer w0.254: P1.1@4.445,5.461 3.937,4.953 3.937,2.87 4.521,2.286 17.459,2.286 17.98,2.807 17.98,6.296 18.796,7.112 v1(18.923,7.112) ; v1@15.357,18.024 cw(c14.721,17.388) 15.621,17.388 cw(c16.521,17.388) v1@15.885,18.024 ; v1(15.621,18.288) 15.621,15.951 C6.2@16.84,14.732 16.84,13.894 ; 15.735,15.837 cw(c14.919,15.021) C6.2@15.87,14.368 ; C6.2@16.591,14.455 cw(c16.085,13.894) 16.84,13.894 ; C6.2@17.09,14.455 ccw(c17.595,13.894) 16.84,13.894 ; 18.069,6.385 cw(c18.923,5.532) v1@18.923,6.739 ; 18.376,6.692 ccw(c17.956,7.112) v1@18.55,7.112 ; v1@18.405,10.678 ccw(c17.769,11.314) 18.669,11.314 ccw(c19.569,11.314) v1@18.933,10.678 ; 18.503,6.819 cw(c18.923,6.399) v1@18.923,6.993 ; v1(18.669,10.414) 18.669,12.065 16.84,13.894
  Bottom Layer w0.254: F2.1@10.592,3.658 13.03,6.096 17.761,6.096 18.777,7.112 v1(18.923,7.112) 18.923,9.398 18.669,9.652 ; F2.1@10.592,4.127 ccw(c10.592,5.259) 11.392,4.458 ; F2.1@10.592,4.381 ccw(c10.592,6.126) 11.826,4.892 ; F2.1@11.011,3.708 cw(c11.902,3.708) F2.1@11.272,4.338 ; F2.1@11.265,3.708 cw(c12.769,3.708) 11.705,4.771 ; v1(15.621,18.288) 16.51,19.177 22.225,19.177 24.028,17.374 F4.1@24.868,17.374 27.607,17.374 28.902,18.669 33.909,18.669 35.204,17.374 F6.1@35.992,17.374 ; v1@15.621,18.661 ccw(c15.621,19.561) 16.258,18.925 ccw(c16.894,18.288) v1@15.994,18.288 ; 18.037,6.372 cw(c18.923,5.486) v1@18.923,6.739 ; 18.389,6.724 ccw(c18.002,7.112) v1@18.55,7.112 ; v1@18.44,10.119 cw(c18.077,9.652) 18.669,9.652 ; 18.471,6.806 cw(c18.923,6.353) v1@18.923,6.993 ; v1@18.659,7.376 ccw(c18.023,8.012) 18.923,8.012 ccw(c19.823,8.012) v1@19.187,7.376 ; v1(18.669,10.414) 18.669,9.652 ; v1@18.898,10.119 ccw(c19.261,9.652) 18.669,9.652 ; 22.67,18.732 ccw(c24.324,20.386) F4.1@24.747,18.086 ; 23.012,18.39 ccw(c24.43,19.808) F4.1@24.792,17.836 ; 23.354,18.048 ccw(c24.536,19.23) F4.1@24.838,17.586 ; 23.696,17.706 ccw(c24.642,18.652) F4.1@24.884,17.336 ; 24.038,17.364 ccw(c24.749,18.075) F4.1@24.93,17.086 ; F4.1@25.164,17.077 cw(c25.88,16.362) 25.88,17.374 cw(c25.88,18.385) F4.1@25.164,17.67 ; F4.1@25.344,16.898 cw(c26.493,15.749) 26.493,17.374 cw(c26.493,18.998) F4.1@25.344,17.85 ; 34.328,18.25 ccw(c35.166,19.088) F6.1@35.693,18.027 ; 34.578,18 ccw(c35.332,18.754) F6.1@35.806,17.799 ; 34.828,17.75 ccw(c35.498,18.42) F6.1@35.919,17.571 ; 35.078,17.5 ccw(c35.663,18.086) F6.1@36.031,17.344